# Altium PCB Inc_filter_v1.PcbDoc (part 1 of 4)
Units mil, origin at the board's own origin, x right, y up, seen from the top; angles counter-clockwise.
Board outline 13370 x 13370 mil, 2 copper layers (Top Layer, Bottom Layer); 602 components, 261 nets, 1625 pads, 355 vias.
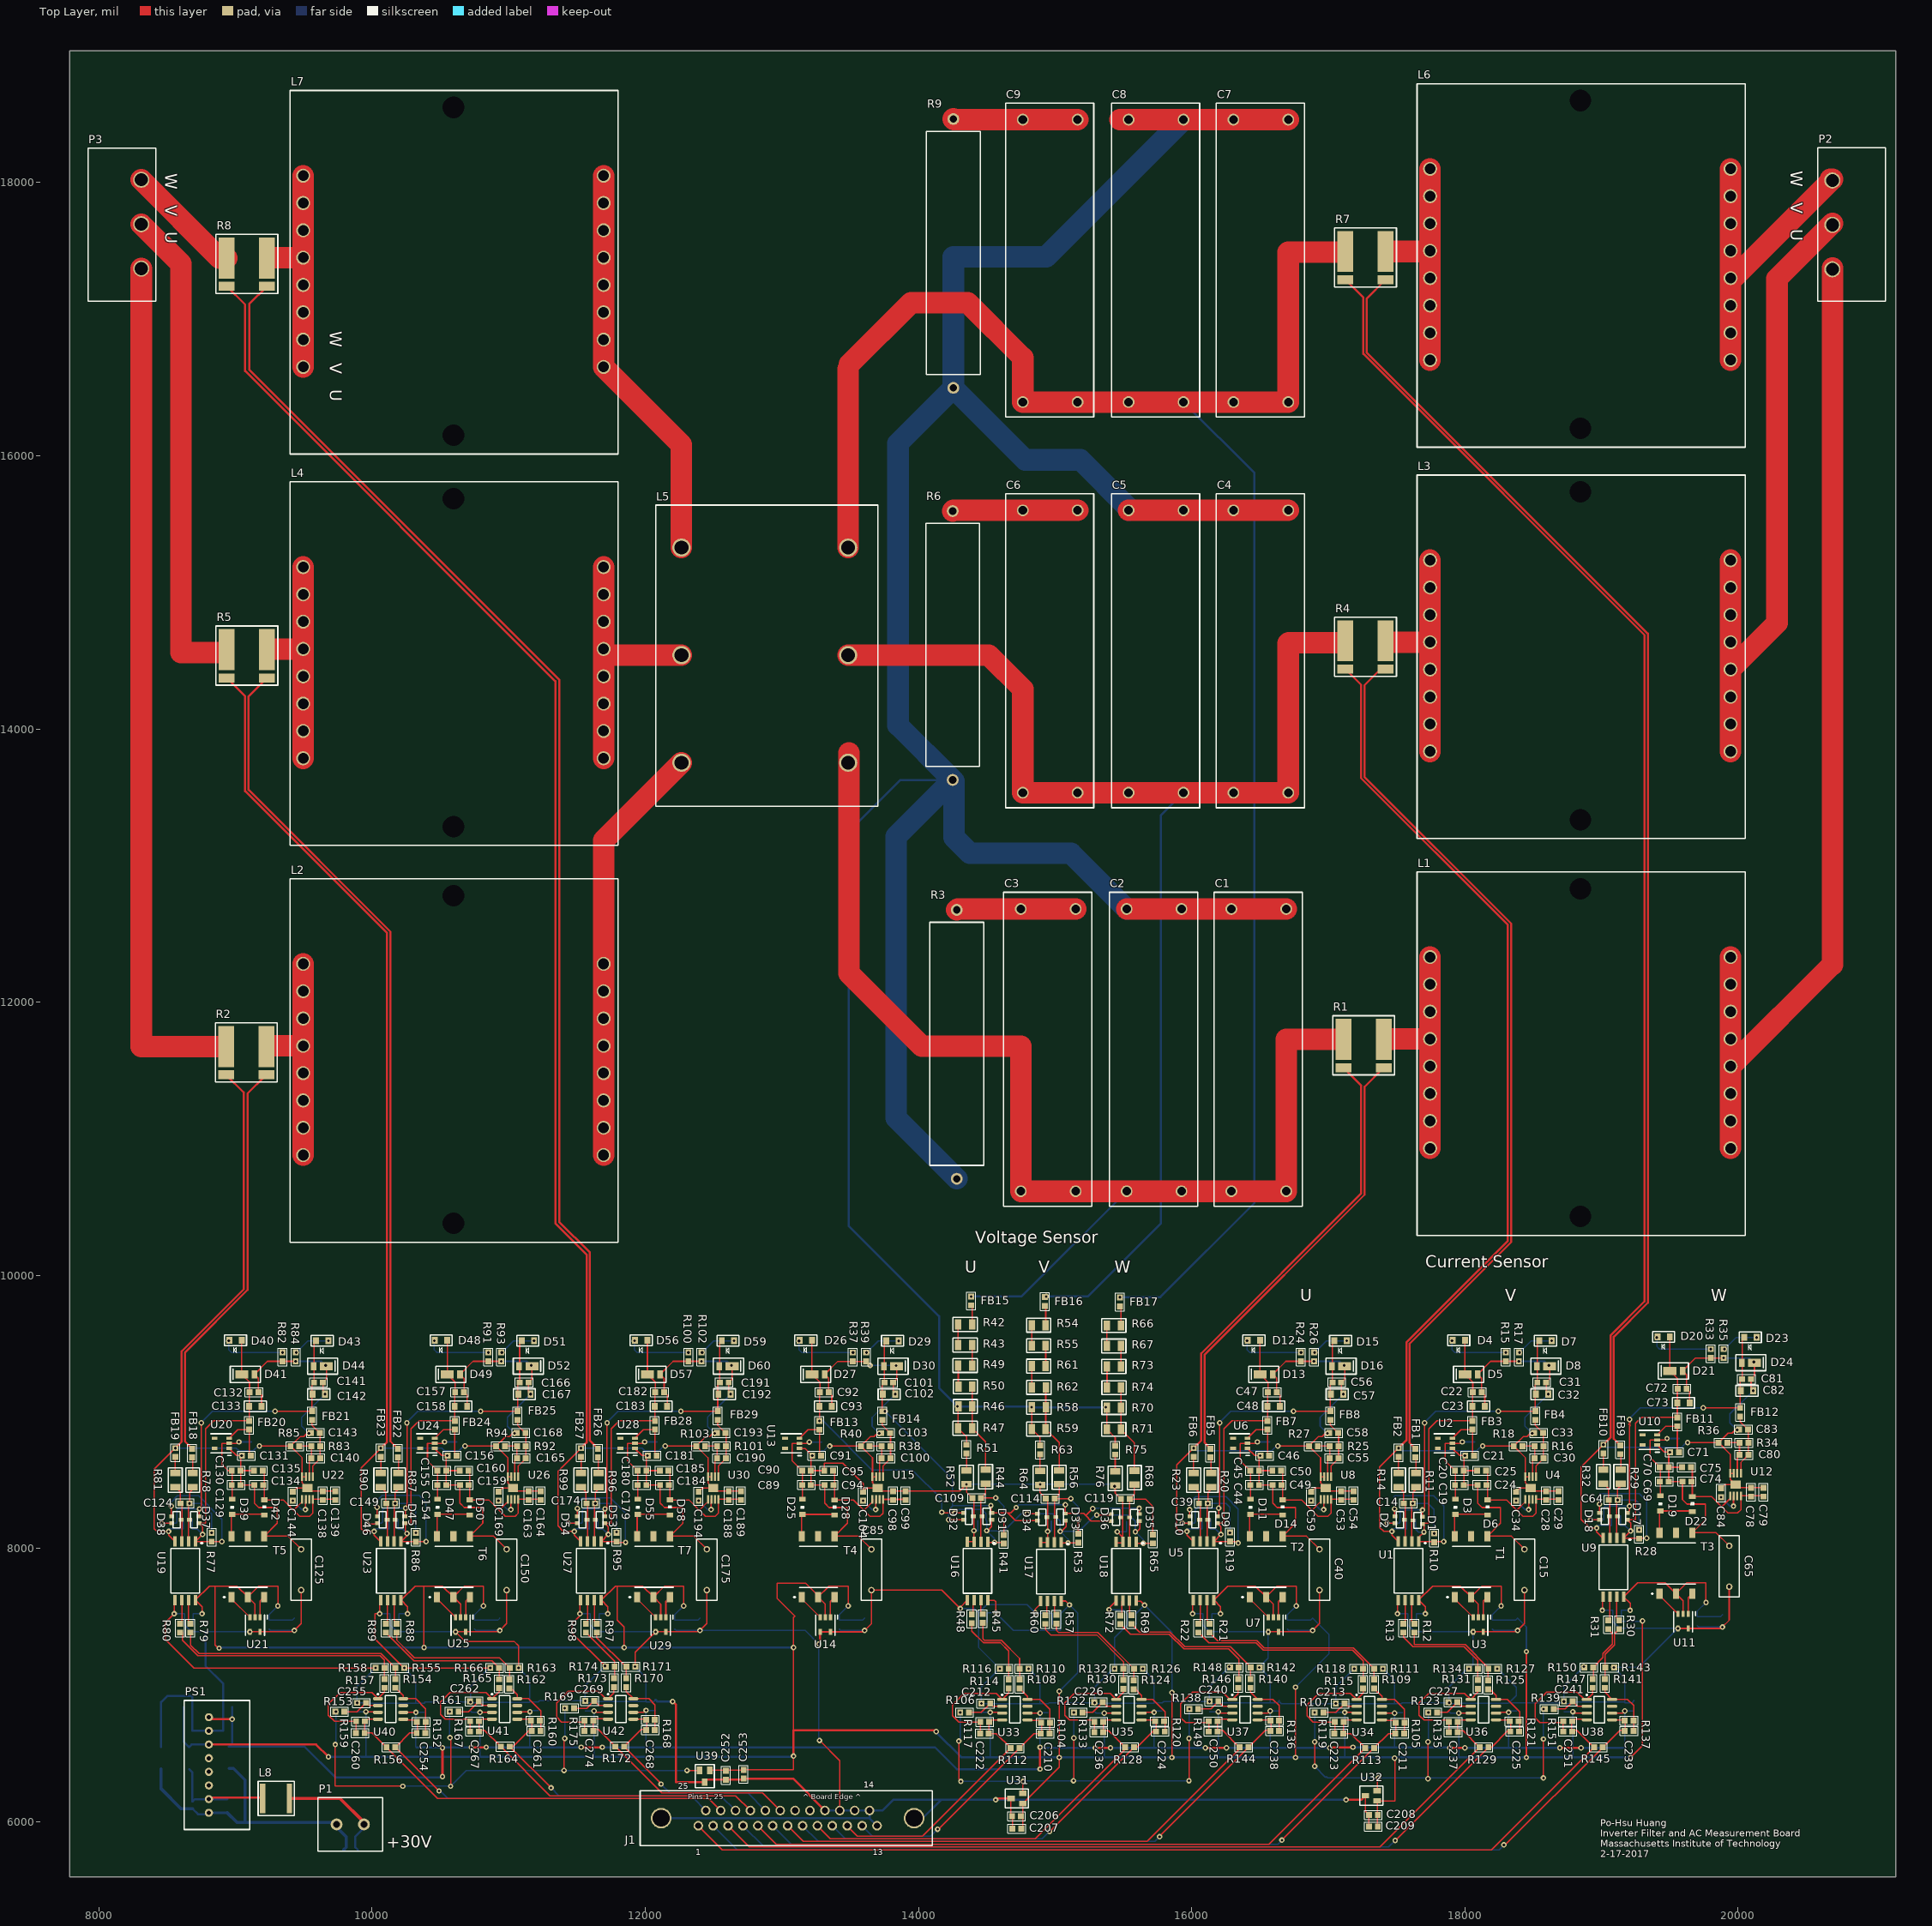
[diagram p0: Top Layer view]
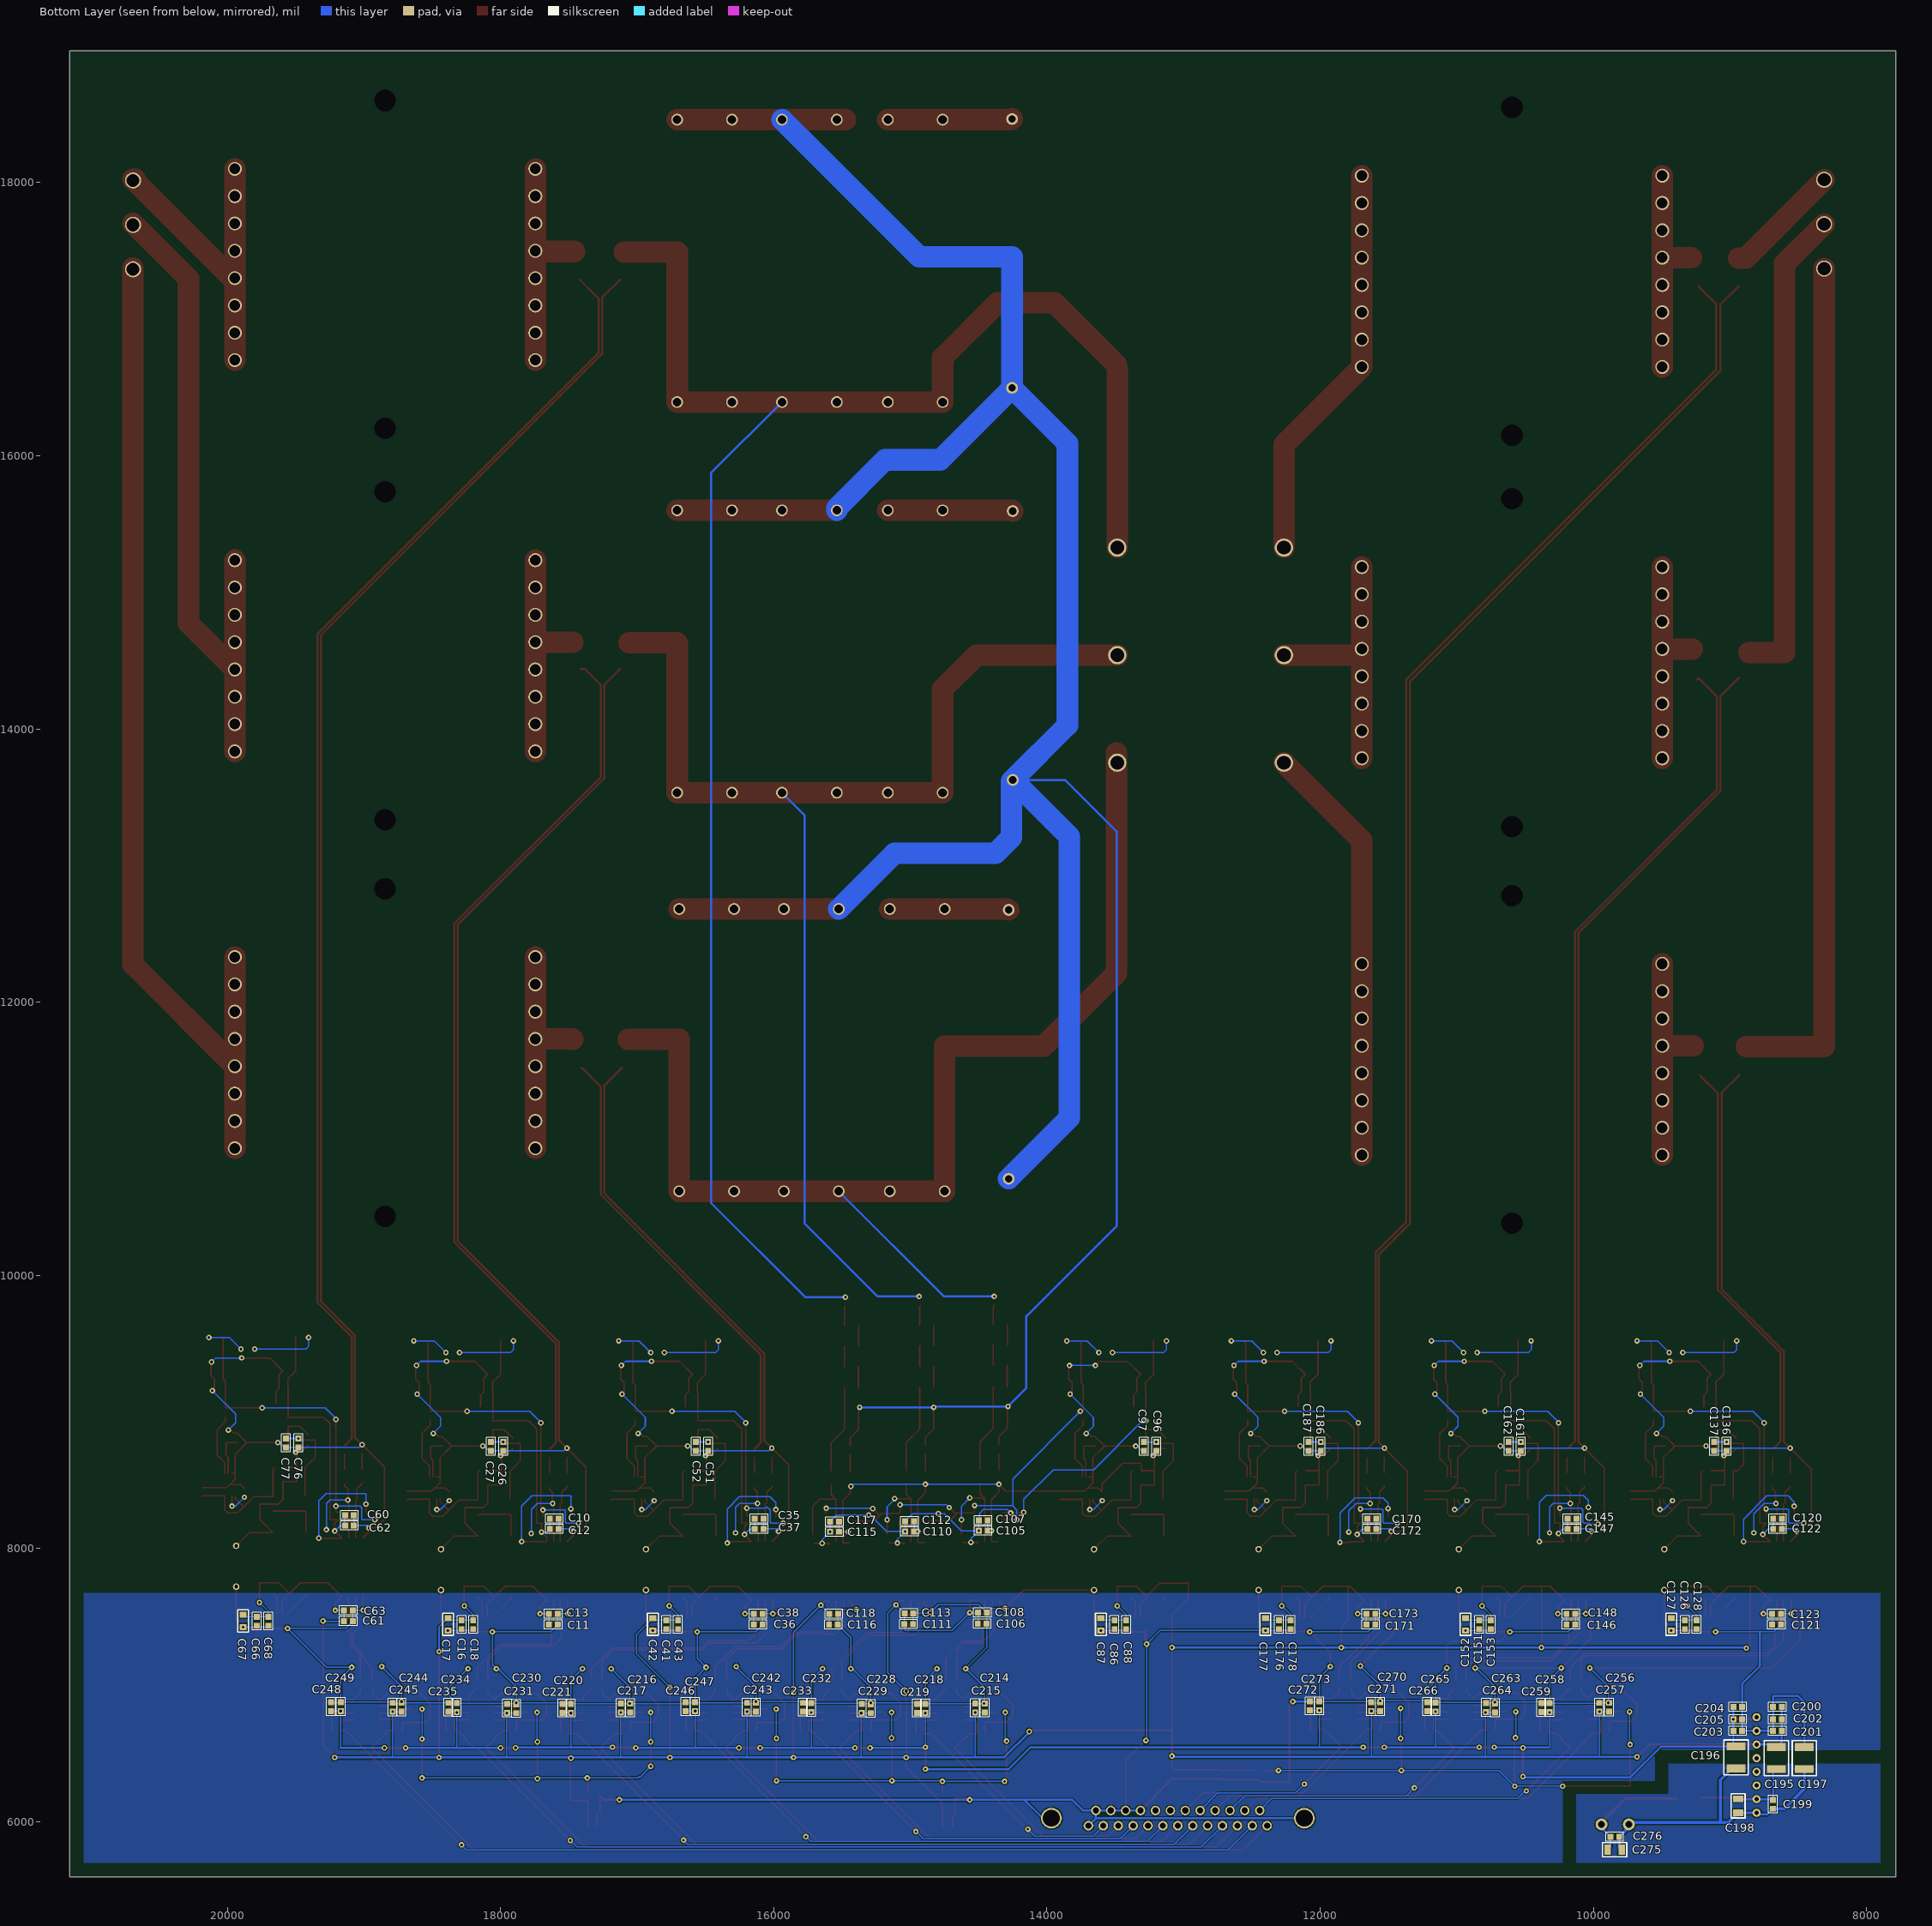
[diagram p1: Bottom Layer view, seen from below]

## Layer stack, top to bottom
Top Solder: solder mask 0.4, Solder Resist, Dk 3.5
Top Layer: signal copper 2.8
Dielectric 1: dielectric 12.6, FR-4, Dk 4.8
Bottom Layer: signal copper 2.8
Bottom Solder: solder mask 0.4, Solder Resist, Dk 3.5

## Board outline
7785,5595 21155,5595 21155,18965 7785,18965

## Design rules (kind name [scope] priority, off if disabled: settings)
Clearance [All] p1: gap=8 ignorepadtopadclearanceinfootprint=FALSE
HoleSize [All] p1: absolutevalues=TRUE maxlimit=200 minlimit=15 maxpercent=80.000 minpercent=20.000
MinimumSolderMaskSliver [All] p1: minsoldermaskwidth=6
PolygonConnect [All] p1: connectstyle=Relief reliefconductorwidth=10 reliefentries=4 polygonreliefangle="90 Angle" airgapwidth=10
RoutingVias [All] p1: holewidth=20 width=40 viastyle="Through Hole" minholewidth=20 minwidth=40 maxholewidth=25 maxwidth=50
SilkToSilkClearance [All] p1 off: silktosilkclearance=10
SilkToSolderMaskClearance [IsPad] p1 off: minsilkscreentomaskgap=10 clearancetoexposedcopper=TRUE
SolderMaskExpansion [All] p1: expansion=0
Width [All] p1: maxlimit=400 minlimit=7 preferedwidth=10
26 further rules are at their usual default settings.

## Classes and differential pairs
component class "Power Supply": C195 C196 C197 C198 C199 C200 C201 C202 C203 C204 C205 C275 C276 L8 P1 PS1
component class Out_current_sensor_UVW: C120 C121 C122 C123 C124 C125 C126 C127 C128 C129 C130 C131 C132 C133 C134 C135 C136 C137 C138 C139 C140 C141 C142 C143 C144 C145 C146 C147 C148 C149 C150 C151 C152 C153 C154 C155 C156 C157 C158 C159 C160 C161 C162 C163 C164 C165 C166 C167 C168 C169 C170 C171 C172 C173 C174 C175 C176 C177 C178 C179 C180 C181 C182 C183 C184 C185 C186 C187 C188 C189 C190 C191 C192 C193 C194 D37 D38 D39 D40 D41 D42 D43 D44 D45 D46 D47 D48 D49 D50 D51 D52 D53 D54 D55 D56 D57 D58 D59 D60 FB18 FB19 FB20 FB21 FB22 FB23 FB24 FB25 FB26 FB27 FB28 FB29 R77 R78 R79 R80 R81 R82 R83 R84 R85 R86 R87 R88 R89 R90 R91 R92 R93 R94 R95 R96 R97 R98 R99 R100 R101 R102 R103 T5 T6 T7 U19 U20 U21 U22 U23 U24 U25 U26 U27 U28 U29 U30
component class Voltage_sensor_UVW: C85 C86 C87 C88 C89 C90 C91 C92 C93 C94 C95 C96 C97 C98 C99 C100 C101 C102 C103 C104 C105 C106 C107 C108 C109 C110 C111 C112 C113 C114 C115 C116 C117 C118 C119 D25 D26 D27 D28 D29 D30 D31 D32 D33 D34 D35 D36 FB13 FB14 FB15 FB16 FB17 R37 R38 R39 R40 R41 R42 R43 R44 R45 R46 R47 R48 R49 R50 R51 R52 R53 R54 R55 R56 R57 R58 R59 R60 R61 R62 R63 R64 R65 R66 R67 R68 R69 R70 R71 R72 R73 R74 R75 R76 T4 U13 U14 U15 U16 U17 U18
component class Ind_current_sensor_VW: C10 C11 C12 C13 C14 C15 C16 C17 C18 C19 C20 C21 C22 C23 C24 C25 C26 C27 C28 C29 C30 C31 C32 C33 C34 C60 C61 C62 C63 C64 C65 C66 C67 C68 C69 C70 C71 C72 C73 C74 C75 C76 C77 C78 C79 C80 C81 C82 C83 C84 D1 D2 D3 D4 D5 D6 D7 D8 D17 D18 D19 D20 D21 D22 D23 D24 FB1 FB2 FB3 FB4 FB9 FB10 FB11 FB12 R10 R11 R12 R13 R14 R15 R16 R17 R18 R28 R29 R30 R31 R32 R33 R34 R35 R36 T1 T3 U1 U2 U3 U4 U9 U10 U11 U12
component class LCL: C1 C2 C3 C4 C5 C6 C7 C8 C9 J1 L1 L2 L3 L4 L5 L6 L7 P2 P3 R1 R2 R3 R4 R5 R6 R7 R8 R9 R?
component class Ind_current_sensor_U: C35 C36 C37 C38 C39 C40 C41 C42 C43 C44 C45 C46 C47 C48 C49 C50 C51 C52 C53 C54 C55 C56 C57 C58 C59 D9 D10 D11 D12 D13 D14 D15 D16 FB5 FB6 FB7 FB8 R19 R20 R21 R22 R23 R24 R25 R26 R27 T2 U5 U6 U7 U8
component class "Analog Transmission": C206 C207 C208 C209 C210 C211 C212 C213 C214 C215 C216 C217 C218 C219 C220 C221 C222 C223 C224 C225 C226 C227 C228 C229 C230 C231 C232 C233 C234 C235 C236 C237 C238 C239 C240 C241 C242 C243 C244 C245 C246 C247 C248 C249 C250 C251 C252 C253 C254 C255 C256 C257 C258 C259 C260 C261 C262 C263 C264 C265 C266 C267 C268 C269 C270 C271 C272 C273 C274 R104 R105 R106 R107 R108 R109 R110 R111 R112 R113 R114 R115 R116 R117 R118 R119 R120 R121 R122 R123 R124 R125 R126 R127 R128 R129 R130 R131 R132 R133 R134 R135 R136 R137 R138 R139 R140 R141 R142 R143 R144 R145 R146 R147 R148 R149 R150 R151 R152 R153 R154 R155 R156 R157 R158 R159 R160 R161 R162 R163 R164 R165 R166 R167 R168 R169 R170 R171 R172 R173 R174 R175 U31 U32 U33 U34 U35 U36 U37 U38 U39 U40 U41 U42

## Components (designator, comment, footprint, x,y, rotation, side; value= is the part's Value field where it differs from the comment)
C1 "Cap Film Radial - 4 Leads" "Radial - 4 Leads" 16691.57,12681.93 r270 top
C2 "Cap Film Radial - 4 Leads" "Radial - 4 Leads" 15925,12681.93 r270 top
C3 "Cap Film Radial - 4 Leads" "Radial - 4 Leads" 15150,12681.93 r270 top
C4 "Cap Film Radial - 4 Leads" "Radial - 4 Leads" 16706.57,15600 r270 top
C5 "Cap Film Radial - 4 Leads" "Radial - 4 Leads" 15940,15600 r270 top
C6 "Cap Film Radial - 4 Leads" "Radial - 4 Leads" 15165,15600 r270 top
C7 "Cap Film Radial - 4 Leads" "Radial - 4 Leads" 16706.57,18460 r270 top
C8 "Cap Film Radial - 4 Leads" "Radial - 4 Leads" 15940,18460 r270 top
C9 "Cap Film Radial - 4 Leads" "Radial - 4 Leads" 15165,18460 r270 top
C10 "Cap 0603_new" "0603 (1608 Metric)" 17606.48,8217.96 r0 bottom value=1uF
C11 "Cap 0603_new" "0603 (1608 Metric)" 17614,7441.96 r180 bottom value=1uF
C12 "Cap 0603_new" "0603 (1608 Metric)" 17606.48,8141.96 r0 bottom value=0.1uF
C13 "Cap 0603_new" "0603 (1608 Metric)" 17614,7521.96 r180 bottom value=0.1uF
C14 "Cap 0603_new" "0603 (1608 Metric)" 17586,8329.96 r180 top value=330pF
C15 "Cap TH" RAD-0.3 18435.28,7845 r90 top value=1000pF
C16 "Cap 0603_new" "0603 (1608 Metric)" 18285.28,7442.48 r90 bottom value=10uF
C17 "Cap 0805" "0805 (2012 metric)" 18385.28,7445 r90 bottom value=22uF
C18 "Cap 0603_new" "0603 (1608 Metric)" 18200.28,7442.48 r90 bottom value=0.1uF
C19 "Cap 0603_new" "0603 (1608 Metric)" 17960.28,8465 r180 top value=10uF
C20 "Cap 0603_new" "0603 (1608 Metric)" 17960.28,8570 r180 top value=0.1uF
C21 "Cap 0603_new" "0603 (1608 Metric)" 18035.28,8680 r0 top value=10uF
C22 "Cap 0603_new" "0603 (1608 Metric)" 18090.28,9145 r180 top value=0.1uF
C23 "Cap 0805" "0805 (2012 metric)" 18100.28,9040 r180 top value=4.7uF
C24 "Cap 0603_new" "0603 (1608 Metric)" 18125.28,8465 r180 top value=10uF
C25 "Cap 0603_new" "0603 (1608 Metric)" 18122.8,8570 r180 top value=0.1uF
C26 "Cap 0603_new" "0603 (1608 Metric)" 17980.28,8747.52 r90 bottom value=10uF
C27 "Cap 0603_new" "0603 (1608 Metric)" 18070.28,8747.52 r90 bottom value=0.1uF
C28 "Cap 0603_new" "0603 (1608 Metric)" 18595.28,8387.48 r270 top value=10uF
C29 "Cap 0603_new" "0603 (1608 Metric)" 18685.28,8387.52 r270 top value=0.1uF
C30 "Cap 0603_new" "0603 (1608 Metric)" 18542.8,8660 r180 top value=0.01uF
C31 "Cap 0603_new" "0603 (1608 Metric)" 18562.8,9215 r180 top value=0.1uF
C32 "Cap 0805" "0805 (2012 metric)" 18565,9130 r180 top value=4.7uF
C33 "Cap 0603_new" "0603 (1608 Metric)" 18540.28,8845 r0 top value=10uF
C34 "Cap 0603_new" "0603 (1608 Metric)" 18375.28,8382.48 r270 top value=0.01uF
C35 "Cap 0603_new" "0603 (1608 Metric)" 16106.48,8217.96 r0 bottom value=1uF
C36 "Cap 0603_new" "0603 (1608 Metric)" 16114,7441.96 r180 bottom value=1uF
C37 "Cap 0603_new" "0603 (1608 Metric)" 16106.48,8141.96 r0 bottom value=0.1uF
C38 "Cap 0603_new" "0603 (1608 Metric)" 16114,7521.96 r180 bottom value=0.1uF
C39 "Cap 0603_new" "0603 (1608 Metric)" 16086,8329.96 r180 top value=330pF
C40 "Cap TH" RAD-0.3 16935.28,7845 r90 top value=1000pF
C41 "Cap 0603_new" "0603 (1608 Metric)" 16785.28,7442.48 r90 bottom value=10uF
C42 "Cap 0805" "0805 (2012 metric)" 16885.28,7445 r90 bottom value=22uF
C43 "Cap 0603_new" "0603 (1608 Metric)" 16700.28,7442.48 r90 bottom value=0.1uF
C44 "Cap 0603_new" "0603 (1608 Metric)" 16460.28,8465 r180 top value=10uF
C45 "Cap 0603_new" "0603 (1608 Metric)" 16460.28,8570 r180 top value=0.1uF
C46 "Cap 0603_new" "0603 (1608 Metric)" 16535.28,8680 r0 top value=10uF
C47 "Cap 0603_new" "0603 (1608 Metric)" 16590.28,9145 r180 top value=0.1uF
C48 "Cap 0805" "0805 (2012 metric)" 16600.28,9040 r180 top value=4.7uF
C49 "Cap 0603_new" "0603 (1608 Metric)" 16625.28,8465 r180 top value=10uF
C50 "Cap 0603_new" "0603 (1608 Metric)" 16622.8,8570 r180 top value=0.1uF
C51 "Cap 0603_new" "0603 (1608 Metric)" 16480.28,8747.52 r90 bottom value=10uF
C52 "Cap 0603_new" "0603 (1608 Metric)" 16570.28,8747.52 r90 bottom value=0.1uF
C53 "Cap 0603_new" "0603 (1608 Metric)" 17095.28,8387.48 r270 top value=10uF
C54 "Cap 0603_new" "0603 (1608 Metric)" 17185.28,8387.52 r270 top value=0.1uF
C55 "Cap 0603_new" "0603 (1608 Metric)" 17042.8,8660 r180 top value=0.01uF
C56 "Cap 0603_new" "0603 (1608 Metric)" 17062.8,9215 r180 top value=0.1uF
C57 "Cap 0805" "0805 (2012 metric)" 17065,9130 r180 top value=4.7uF
C58 "Cap 0603_new" "0603 (1608 Metric)" 17040.28,8845 r0 top value=10uF
C59 "Cap 0603_new" "0603 (1608 Metric)" 16875.28,8382.48 r270 top value=0.01uF
C60 "Cap 0603_new" "0603 (1608 Metric)" 19106.2,8242.96 r0 bottom value=1uF
C61 "Cap 0603_new" "0603 (1608 Metric)" 19113.72,7466.96 r180 bottom value=1uF
C62 "Cap 0603_new" "0603 (1608 Metric)" 19106.2,8166.96 r0 bottom value=0.1uF
C63 "Cap 0603_new" "0603 (1608 Metric)" 19113.72,7546.96 r180 bottom value=0.1uF
C64 "Cap 0603_new" "0603 (1608 Metric)" 19085.72,8354.96 r180 top value=330pF
C65 "Cap TH" RAD-0.3 19935,7870 r90 top value=1000pF
C66 "Cap 0603_new" "0603 (1608 Metric)" 19785,7467.48 r90 bottom value=10uF
C67 "Cap 0805" "0805 (2012 metric)" 19885,7470 r90 bottom value=22uF
C68 "Cap 0603_new" "0603 (1608 Metric)" 19700,7467.48 r90 bottom value=0.1uF
C69 "Cap 0603_new" "0603 (1608 Metric)" 19460,8490 r180 top value=10uF
C70 "Cap 0603_new" "0603 (1608 Metric)" 19460,8595 r180 top value=0.1uF
C71 "Cap 0603_new" "0603 (1608 Metric)" 19535,8705 r0 top value=10uF
C72 "Cap 0603_new" "0603 (1608 Metric)" 19590,9170 r180 top value=0.1uF
C73 "Cap 0805" "0805 (2012 metric)" 19600,9065 r180 top value=4.7uF
C74 "Cap 0603_new" "0603 (1608 Metric)" 19625,8490 r180 top value=10uF
C75 "Cap 0603_new" "0603 (1608 Metric)" 19622.52,8595 r180 top value=0.1uF
C76 "Cap 0603_new" "0603 (1608 Metric)" 19480,8772.52 r90 bottom value=10uF
C77 "Cap 0603_new" "0603 (1608 Metric)" 19570,8772.52 r90 bottom value=0.1uF
C78 "Cap 0603_new" "0603 (1608 Metric)" 20095,8412.48 r270 top value=10uF
C79 "Cap 0603_new" "0603 (1608 Metric)" 20185,8412.52 r270 top value=0.1uF
C80 "Cap 0603_new" "0603 (1608 Metric)" 20042.52,8685 r180 top value=0.01uF
C81 "Cap 0603_new" "0603 (1608 Metric)" 20062.52,9240 r180 top value=0.1uF
C82 "Cap 0805" "0805 (2012 metric)" 20064.72,9155 r180 top value=4.7uF
C83 "Cap 0603_new" "0603 (1608 Metric)" 20040,8870 r0 top value=10uF
C84 "Cap 0603_new" "0603 (1608 Metric)" 19875,8407.48 r270 top value=0.01uF
C85 "Cap TH" RAD-0.3 13655,7844.72 r90 top value=1000pF
C86 "Cap 0603_new" "0603 (1608 Metric)" 13505,7442.2 r90 bottom value=10uF
C87 "Cap 0805" "0805 (2012 metric)" 13605,7444.72 r90 bottom value=22uF
C88 "Cap 0603_new" "0603 (1608 Metric)" 13420,7442.2 r90 bottom value=0.1uF
C89 "Cap 0603_new" "0603 (1608 Metric)" 13180,8464.72 r180 top value=10uF
C90 "Cap 0603_new" "0603 (1608 Metric)" 13180,8569.72 r180 top value=0.1uF
C91 "Cap 0603_new" "0603 (1608 Metric)" 13255,8679.72 r0 top value=10uF
C92 "Cap 0603_new" "0603 (1608 Metric)" 13310,9144.72 r180 top value=0.1uF
C93 "Cap 0805" "0805 (2012 metric)" 13320,9039.72 r180 top value=4.7uF
C94 "Cap 0603_new" "0603 (1608 Metric)" 13345,8464.72 r180 top value=10uF
C95 "Cap 0603_new" "0603 (1608 Metric)" 13342.52,8569.72 r180 top value=0.1uF
C96 "Cap 0603_new" "0603 (1608 Metric)" 13200,8747.24 r90 bottom value=10uF
C97 "Cap 0603_new" "0603 (1608 Metric)" 13290,8747.24 r90 bottom value=0.1uF
C98 "Cap 0603_new" "0603 (1608 Metric)" 13815,8387.2 r270 top value=10uF
C99 "Cap 0603_new" "0603 (1608 Metric)" 13905,8387.24 r270 top value=0.1uF
C100 "Cap 0603_new" "0603 (1608 Metric)" 13762.52,8659.72 r180 top value=0.01uF
C101 "Cap 0603_new" "0603 (1608 Metric)" 13782.52,9214.72 r180 top value=0.1uF
C102 "Cap 0805" "0805 (2012 metric)" 13784.72,9129.72 r180 top value=4.7uF
C103 "Cap 0603_new" "0603 (1608 Metric)" 13760,8844.72 r0 top value=10uF
C104 "Cap 0603_new" "0603 (1608 Metric)" 13595,8382.2 r270 top value=0.01uF
C105 "Cap 0603_new" "0603 (1608 Metric)" 14466.18,8130 r0 bottom value=1uF
C106 "Cap 0603_new" "0603 (1608 Metric)" 14473.7,7450 r180 bottom value=1uF
C107 "Cap 0603_new" "0603 (1608 Metric)" 14466.18,8205 r0 bottom value=0.1uF
C108 "Cap 0603_new" "0603 (1608 Metric)" 14471.18,7530 r180 bottom value=0.1uF
C109 "Cap 0603_new" "0603 (1608 Metric)" 14426.18,8370 r180 top value=330pF
C110 "Cap 0603_new" "0603 (1608 Metric)" 15004.96,8124.96 r0 bottom value=1uF
C111 "Cap 0603_new" "0603 (1608 Metric)" 15012.48,7444.96 r180 bottom value=1uF
C112 "Cap 0603_new" "0603 (1608 Metric)" 15004.96,8199.96 r0 bottom value=0.1uF
C113 "Cap 0603_new" "0603 (1608 Metric)" 15009.96,7524.96 r180 bottom value=0.1uF
C114 "Cap 0603_new" "0603 (1608 Metric)" 14964.96,8364.96 r180 top value=330pF
C115 "Cap 0603_new" "0603 (1608 Metric)" 15555,8122.48 r0 bottom value=1uF
C116 "Cap 0603_new" "0603 (1608 Metric)" 15562.52,7442.48 r180 bottom value=1uF
C117 "Cap 0603_new" "0603 (1608 Metric)" 15555,8197.48 r0 bottom value=0.1uF
C118 "Cap 0603_new" "0603 (1608 Metric)" 15560,7522.48 r180 bottom value=0.1uF
C119 "Cap 0603_new" "0603 (1608 Metric)" 15515,8362.48 r180 top value=330pF
C120 "Cap 0603_new" "0603 (1608 Metric)" 8651.2,8217.96 r0 bottom value=1uF
C121 "Cap 0603_new" "0603 (1608 Metric)" 8658.72,7441.96 r180 bottom value=1uF
C122 "Cap 0603_new" "0603 (1608 Metric)" 8651.2,8141.96 r0 bottom value=0.1uF
C123 "Cap 0603_new" "0603 (1608 Metric)" 8658.72,7521.96 r180 bottom value=0.1uF
C124 "Cap 0603_new" "0603 (1608 Metric)" 8630.72,8329.96 r180 top value=330pF
C125 "Cap TH" RAD-0.3 9480,7845 r90 top value=1000pF
C126 "Cap 0603_new" "0603 (1608 Metric)" 9330,7442.48 r90 bottom value=10uF
C127 "Cap 0805" "0805 (2012 metric)" 9430,7445 r90 bottom value=22uF
C128 "Cap 0603_new" "0603 (1608 Metric)" 9245,7442.48 r90 bottom value=0.1uF
C129 "Cap 0603_new" "0603 (1608 Metric)" 9005,8465 r180 top value=10uF
C130 "Cap 0603_new" "0603 (1608 Metric)" 9005,8570 r180 top value=0.1uF
C131 "Cap 0603_new" "0603 (1608 Metric)" 9080,8680 r0 top value=10uF
C132 "Cap 0603_new" "0603 (1608 Metric)" 9135,9145 r180 top value=0.1uF
C133 "Cap 0805" "0805 (2012 metric)" 9145,9040 r180 top value=4.7uF
C134 "Cap 0603_new" "0603 (1608 Metric)" 9170,8465 r180 top value=10uF
C135 "Cap 0603_new" "0603 (1608 Metric)" 9167.52,8570 r180 top value=0.1uF
C136 "Cap 0603_new" "0603 (1608 Metric)" 9025,8747.52 r90 bottom value=10uF
C137 "Cap 0603_new" "0603 (1608 Metric)" 9115,8747.52 r90 bottom value=0.1uF
C138 "Cap 0603_new" "0603 (1608 Metric)" 9640,8387.48 r270 top value=10uF
C139 "Cap 0603_new" "0603 (1608 Metric)" 9730,8387.52 r270 top value=0.1uF
C140 "Cap 0603_new" "0603 (1608 Metric)" 9587.52,8660 r180 top value=0.01uF
C141 "Cap 0603_new" "0603 (1608 Metric)" 9607.52,9215 r180 top value=0.1uF
C142 "Cap 0805" "0805 (2012 metric)" 9609.72,9130 r180 top value=4.7uF
C143 "Cap 0603_new" "0603 (1608 Metric)" 9585,8845 r0 top value=10uF
C144 "Cap 0603_new" "0603 (1608 Metric)" 9420,8382.48 r270 top value=0.01uF
C145 "Cap 0603_new" "0603 (1608 Metric)" 10156.2,8217.96 r0 bottom value=1uF
C146 "Cap 0603_new" "0603 (1608 Metric)" 10163.72,7441.96 r180 bottom value=1uF
C147 "Cap 0603_new" "0603 (1608 Metric)" 10156.2,8141.96 r0 bottom value=0.1uF
C148 "Cap 0603_new" "0603 (1608 Metric)" 10163.72,7521.96 r180 bottom value=0.1uF
C149 "Cap 0603_new" "0603 (1608 Metric)" 10135.72,8329.96 r180 top value=330pF
C150 "Cap TH" RAD-0.3 10985,7845 r90 top value=1000pF
C151 "Cap 0603_new" "0603 (1608 Metric)" 10835,7442.48 r90 bottom value=10uF
C152 "Cap 0805" "0805 (2012 metric)" 10935,7445 r90 bottom value=22uF
C153 "Cap 0603_new" "0603 (1608 Metric)" 10750,7442.48 r90 bottom value=0.1uF
C154 "Cap 0603_new" "0603 (1608 Metric)" 10510,8465 r180 top value=10uF
C155 "Cap 0603_new" "0603 (1608 Metric)" 10510,8570 r180 top value=0.1uF
C156 "Cap 0603_new" "0603 (1608 Metric)" 10585,8680 r0 top value=10uF
C157 "Cap 0603_new" "0603 (1608 Metric)" 10640,9145 r180 top value=0.1uF
C158 "Cap 0805" "0805 (2012 metric)" 10650,9040 r180 top value=4.7uF
C159 "Cap 0603_new" "0603 (1608 Metric)" 10675,8465 r180 top value=10uF
C160 "Cap 0603_new" "0603 (1608 Metric)" 10672.52,8570 r180 top value=0.1uF
C161 "Cap 0603_new" "0603 (1608 Metric)" 10530,8747.52 r90 bottom value=10uF
C162 "Cap 0603_new" "0603 (1608 Metric)" 10620,8747.52 r90 bottom value=0.1uF
C163 "Cap 0603_new" "0603 (1608 Metric)" 11145,8387.48 r270 top value=10uF
C164 "Cap 0603_new" "0603 (1608 Metric)" 11235,8387.52 r270 top value=0.1uF
C165 "Cap 0603_new" "0603 (1608 Metric)" 11092.52,8660 r180 top value=0.01uF
C166 "Cap 0603_new" "0603 (1608 Metric)" 11112.52,9215 r180 top value=0.1uF
C167 "Cap 0805" "0805 (2012 metric)" 11114.72,9130 r180 top value=4.7uF
C168 "Cap 0603_new" "0603 (1608 Metric)" 11090,8845 r0 top value=10uF
C169 "Cap 0603_new" "0603 (1608 Metric)" 10925,8382.48 r270 top value=0.01uF
C170 "Cap 0603_new" "0603 (1608 Metric)" 11621.48,8217.96 r0 bottom value=1uF
C171 "Cap 0603_new" "0603 (1608 Metric)" 11629,7441.96 r180 bottom value=1uF
C172 "Cap 0603_new" "0603 (1608 Metric)" 11621.48,8141.96 r0 bottom value=0.1uF
C173 "Cap 0603_new" "0603 (1608 Metric)" 11629,7521.96 r180 bottom value=0.1uF
C174 "Cap 0603_new" "0603 (1608 Metric)" 11601,8329.96 r180 top value=330pF
C175 "Cap TH" RAD-0.3 12450.28,7845 r90 top value=1000pF
C176 "Cap 0603_new" "0603 (1608 Metric)" 12300.28,7442.48 r90 bottom value=10uF
C177 "Cap 0805" "0805 (2012 metric)" 12400.28,7445 r90 bottom value=22uF
C178 "Cap 0603_new" "0603 (1608 Metric)" 12215.28,7442.48 r90 bottom value=0.1uF
C179 "Cap 0603_new" "0603 (1608 Metric)" 11975.28,8465 r180 top value=10uF
C180 "Cap 0603_new" "0603 (1608 Metric)" 11975.28,8570 r180 top value=0.1uF
C181 "Cap 0603_new" "0603 (1608 Metric)" 12050.28,8680 r0 top value=10uF
C182 "Cap 0603_new" "0603 (1608 Metric)" 12105.28,9145 r180 top value=0.1uF
C183 "Cap 0805" "0805 (2012 metric)" 12115.28,9040 r180 top value=4.7uF
C184 "Cap 0603_new" "0603 (1608 Metric)" 12140.28,8465 r180 top value=10uF
C185 "Cap 0603_new" "0603 (1608 Metric)" 12137.8,8570 r180 top value=0.1uF
C186 "Cap 0603_new" "0603 (1608 Metric)" 11995.28,8747.52 r90 bottom value=10uF
C187 "Cap 0603_new" "0603 (1608 Metric)" 12085.28,8747.52 r90 bottom value=0.1uF
C188 "Cap 0603_new" "0603 (1608 Metric)" 12610.28,8387.48 r270 top value=10uF
C189 "Cap 0603_new" "0603 (1608 Metric)" 12700.28,8387.52 r270 top value=0.1uF
C190 "Cap 0603_new" "0603 (1608 Metric)" 12557.8,8660 r180 top value=0.01uF
C191 "Cap 0603_new" "0603 (1608 Metric)" 12577.8,9215 r180 top value=0.1uF
C192 "Cap 0805" "0805 (2012 metric)" 12580,9130 r180 top value=4.7uF
C193 "Cap 0603_new" "0603 (1608 Metric)" 12555.28,8845 r0 top value=10uF
C194 "Cap 0603_new" "0603 (1608 Metric)" 12390.28,8382.48 r270 top value=0.01uF
C195 "Cap 1812" "1812 (4532 Metric)" 8660,6465.71 r180 bottom
C196 "Cap 1812" "1812 (4532 Metric)" 8955,6470.71 r180 bottom
C197 "Cap 1812" "1812 (4532 Metric)" 8455,6465.71 r180 bottom
C198 "Cap 1206" 1206 8940,6116.18 r90 bottom value="10uF 50V"
C199 "Cap 0603_new" "0603 (1608 Metric)" 8685,6127.52 r90 bottom value=0.1uF
C200 "Cap 0603_new" "0603 (1608 Metric)" 8652.48,6840 r180 bottom value=0.1uF
C201 "Cap 0603_new" "0603 (1608 Metric)" 8652.48,6665 r180 bottom value=10nF
C202 "Cap 0603_new" "0603 (1608 Metric)" 8652.48,6750 r180 bottom value=10uF
C203 "Cap 0603_new" "0603 (1608 Metric)" 8942.48,6665 r180 bottom value=0.1uF
C204 "Cap 0603_new" "0603 (1608 Metric)" 8942.48,6840 r180 bottom value=10nF
C205 "Cap 0603_new" "0603 (1608 Metric)" 8942.48,6750 r180 bottom value=10uF
C206 "Cap 0603_new" "0603 (1608 Metric)" 14717.52,6040 r0 top value=10uF
C207 "Cap 0603_new" "0603 (1608 Metric)" 14720,5950 r0 top value=0.1uF
C208 "Cap 0603_new" "0603 (1608 Metric)" 17330,6050 r0 top value=10uF
C209 "Cap 0603_new" "0603 (1608 Metric)" 17330,5965 r0 top value=0.1uF
C210 "Cap 0603_new" "0603 (1608 Metric)" 14927.48,6645 r0 top value=NC
C211 "Cap 0603_new" "0603 (1608 Metric)" 17522.48,6645 r0 top value=NC
C212 "Cap 0603_new" "0603 (1608 Metric)" 14492.52,6865 r0 top value=0.1uF
C213 "Cap 0603_new" "0603 (1608 Metric)" 17087.52,6865 r0 top value=0.1uF
C214 "Cap 0603_new" "0603 (1608 Metric)" 14455,6832.48 r270 bottom value=0.1uF
C215 "Cap 0603_new" "0603 (1608 Metric)" 14525,6832.48 r270 bottom value=10uF
C216 "Cap 0603_new" "0603 (1608 Metric)" 17050,6832.48 r270 bottom value=0.1uF
C217 "Cap 0603_new" "0603 (1608 Metric)" 17120,6832.48 r270 bottom value=10uF
C218 "Cap 0603_new" "0603 (1608 Metric)" 14890,6830 r90 bottom value=0.1uF
C219 "Cap 0603_new" "0603 (1608 Metric)" 14950,6830 r90 bottom value=10uF
C220 "Cap 0603_new" "0603 (1608 Metric)" 17485,6830 r90 bottom value=0.1uF
C221 "Cap 0603_new" "0603 (1608 Metric)" 17545,6830 r90 bottom value=10uF
C222 "Cap 0603_new" "0603 (1608 Metric)" 14482.52,6645 r180 top value=NC
C223 "Cap 0603_new" "0603 (1608 Metric)" 17077.52,6645 r180 top value=NC
C224 "Cap 0603_new" "0603 (1608 Metric)" 15770,6660 r0 top value=NC
C225 "Cap 0603_new" "0603 (1608 Metric)" 18365,6660 r0 top value=NC
C226 "Cap 0603_new" "0603 (1608 Metric)" 15317.52,6875 r0 top value=0.1uF
C227 "Cap 0603_new" "0603 (1608 Metric)" 17912.52,6875 r0 top value=0.1uF
C228 "Cap 0603_new" "0603 (1608 Metric)" 15290,6827.48 r270 bottom value=0.1uF
C229 "Cap 0603_new" "0603 (1608 Metric)" 15355,6830 r270 bottom value=10uF
C230 "Cap 0603_new" "0603 (1608 Metric)" 17885,6827.48 r270 bottom value=0.1uF
C231 "Cap 0603_new" "0603 (1608 Metric)" 17950,6830 r270 bottom value=10uF
C232 "Cap 0603_new" "0603 (1608 Metric)" 15725,6835 r90 bottom value=0.1uF
C233 "Cap 0603_new" "0603 (1608 Metric)" 15785,6837.48 r90 bottom value=10uF
C234 "Cap 0603_new" "0603 (1608 Metric)" 18320,6835 r90 bottom value=0.1uF
C235 "Cap 0603_new" "0603 (1608 Metric)" 18380,6837.48 r90 bottom value=10uF
C236 "Cap 0603_new" "0603 (1608 Metric)" 15320,6655 r180 top value=NC
C237 "Cap 0603_new" "0603 (1608 Metric)" 17915,6655 r180 top value=NC
C238 "Cap 0603_new" "0603 (1608 Metric)" 16607.48,6665 r0 top value=NC
C239 "Cap 0603_new" "0603 (1608 Metric)" 19202.48,6665 r0 top value=NC
C240 "Cap 0603_new" "0603 (1608 Metric)" 16162.52,6880 r0 top value=0.1uF
C241 "Cap 0603_new" "0603 (1608 Metric)" 18757.52,6880 r0 top value=0.1uF
C242 "Cap 0603_new" "0603 (1608 Metric)" 16130,6837.48 r270 bottom value=0.1uF
C243 "Cap 0603_new" "0603 (1608 Metric)" 16195,6837.48 r270 bottom value=10uF
C244 "Cap 0603_new" "0603 (1608 Metric)" 18725,6837.48 r270 bottom value=0.1uF
C245 "Cap 0603_new" "0603 (1608 Metric)" 18790,6837.48 r270 bottom value=10uF
C246 "Cap 0603_new" "0603 (1608 Metric)" 16645,6842.48 r90 bottom value=0.1uF
C247 "Cap 0603_new" "0603 (1608 Metric)" 16575,6842.48 r90 bottom value=10uF
C248 "Cap 0603_new" "0603 (1608 Metric)" 19240,6842.48 r90 bottom value=0.1uF
C249 "Cap 0603_new" "0603 (1608 Metric)" 19170,6842.48 r90 bottom value=10uF
C250 "Cap 0603_new" "0603 (1608 Metric)" 16157.52,6660 r180 top value=NC
C251 "Cap 0603_new" "0603 (1608 Metric)" 18752.52,6660 r180 top value=NC
C252 "Cap 0603_new" "0603 (1608 Metric)" 12590,6340 r90 top value=10uF
C253 "Cap 0603_new" "0603 (1608 Metric)" 12720,6347.52 r90 top value=0.1uF
C254 "Cap 0603_new" "0603 (1608 Metric)" 10357.52,6650 r0 top value=NC
C255 "Cap 0603_new" "0603 (1608 Metric)" 9922.56,6870 r0 top value=0.1uF
C256 "Cap 0603_new" "0603 (1608 Metric)" 9885.04,6837.48 r270 bottom value=0.1uF
C257 "Cap 0603_new" "0603 (1608 Metric)" 9955.04,6837.48 r270 bottom value=10uF
C258 "Cap 0603_new" "0603 (1608 Metric)" 10320.04,6835 r90 bottom value=0.1uF
C259 "Cap 0603_new" "0603 (1608 Metric)" 10380.04,6835 r90 bottom value=10uF
C260 "Cap 0603_new" "0603 (1608 Metric)" 9912.56,6650 r180 top value=NC
C261 "Cap 0603_new" "0603 (1608 Metric)" 11200.04,6665 r0 top value=NC
C262 "Cap 0603_new" "0603 (1608 Metric)" 10747.56,6880 r0 top value=0.1uF
C263 "Cap 0603_new" "0603 (1608 Metric)" 10720.04,6832.48 r270 bottom value=0.1uF
C264 "Cap 0603_new" "0603 (1608 Metric)" 10785.04,6835 r270 bottom value=10uF
C265 "Cap 0603_new" "0603 (1608 Metric)" 11155.04,6840 r90 bottom value=0.1uF
C266 "Cap 0603_new" "0603 (1608 Metric)" 11215.04,6842.48 r90 bottom value=10uF
C267 "Cap 0603_new" "0603 (1608 Metric)" 10750.04,6660 r180 top value=NC
C268 "Cap 0603_new" "0603 (1608 Metric)" 12037.52,6670 r0 top value=NC
C269 "Cap 0603_new" "0603 (1608 Metric)" 11592.56,6885 r0 top value=0.1uF
C270 "Cap 0603_new" "0603 (1608 Metric)" 11560.04,6842.48 r270 bottom value=0.1uF
C271 "Cap 0603_new" "0603 (1608 Metric)" 11625.04,6842.48 r270 bottom value=10uF
C272 "Cap 0603_new" "0603 (1608 Metric)" 12075.04,6847.48 r90 bottom value=0.1uF
C273 "Cap 0603_new" "0603 (1608 Metric)" 12005.04,6847.48 r90 bottom value=10uF
C274 "Cap 0603_new" "0603 (1608 Metric)" 11587.56,6665 r180 top value=NC
C275 "Cap 1206" 1206 9843.82,5795 r180 bottom value="10uF 50V"
C276 "Cap 0603_new" "0603 (1608 Metric)" 9842.52,5890 r180 bottom value=0.1uF
D1 "TVS - Diodes" SOT323_ESD 17615.2,8205.59 r90 top value=ESD
D2 "TVS - Diodes" SOT323_ESD 17561.94,8209.96 r270 top value=ESD
D3 "Diode MBR0520" SOD-123 17930.28,8250 r90 top
D4 "LED" "0805 (2012 Metric) Diode" 17955.28,9525 r180 top
D5 "Diode Zener POWERDI123" POWERDI 18093.78,9275 r180 top
D6 "Diode MBR0520" SOD-123 18165.28,8355.83 r270 top
D7 "LED" "0805 (2012 Metric) Diode" 18590,9520 r180 top
D8 "Diode Zener POWERDI123" POWERDI 18526.77,9335 r0 top
D9 "TVS - Diodes" SOT323_ESD 16114.06,8209.96 r90 top value=ESD
D10 "TVS - Diodes" SOT323_ESD 16061.94,8209.96 r270 top value=ESD
D11 "Diode MBR0520" SOD-123 16430.28,8250 r90 top
D12 "LED" "0805 (2012 Metric) Diode" 16455.28,9525 r180 top
D13 "Diode Zener POWERDI123" POWERDI 16593.78,9275 r180 top
D14 "Diode MBR0520" SOD-123 16665.28,8355.83 r270 top
D15 "LED" "0805 (2012 Metric) Diode" 17090,9520 r180 top
D16 "Diode Zener POWERDI123" POWERDI 17026.77,9335 r0 top
D17 "TVS - Diodes" SOT323_ESD 19113.79,8234.96 r90 top value=ESD
D18 "TVS - Diodes" SOT323_ESD 19061.66,8234.96 r270 top value=ESD
D19 "Diode MBR0520" SOD-123 19430,8275 r90 top
D20 "LED" "0805 (2012 Metric) Diode" 19455,9550 r180 top
D21 "Diode Zener POWERDI123" POWERDI 19593.5,9300 r180 top
D22 "Diode MBR0520" SOD-123 19665,8380.83 r270 top
D23 "LED" "0805 (2012 Metric) Diode" 20089.72,9545 r180 top
D24 "Diode Zener POWERDI123" POWERDI 20026.5,9360 r0 top
D25 "Diode MBR0520" SOD-123 13150,8249.72 r90 top
D26 "LED" "0805 (2012 Metric) Diode" 13175,9524.72 r180 top
D27 "Diode Zener POWERDI123" POWERDI 13313.5,9274.72 r180 top
D28 "Diode MBR0520" SOD-123 13385,8355.55 r270 top
D29 "LED" "0805 (2012 Metric) Diode" 13809.72,9519.72 r180 top
D30 "Diode Zener POWERDI123" POWERDI 13746.5,9334.72 r0 top
D31 "TVS - Diodes" SOT323_ESD 14461.06,8235 r90 top value=ESD
D32 "TVS - Diodes" SOT323_ESD 14404.8,8235.59 r270 top value=ESD
D33 "TVS - Diodes" SOT323_ESD 15000.2,8230.59 r90 top value=ESD
D34 "TVS - Diodes" SOT323_ESD 14943.94,8230 r270 top value=ESD
D35 "TVS - Diodes" SOT323_ESD 15541.06,8227.48 r90 top value=ESD
D36 "TVS - Diodes" SOT323_ESD 15483.94,8227.48 r270 top value=ESD
D37 "TVS - Diodes" SOT323_ESD 8658.79,8209.96 r90 top value=ESD
D38 "TVS - Diodes" SOT323_ESD 8606.66,8209.96 r270 top value=ESD
D39 "Diode MBR0520" SOD-123 8975,8250 r90 top
D40 "LED" "0805 (2012 Metric) Diode" 9000,9525 r180 top
D41 "Diode Zener POWERDI123" POWERDI 9138.5,9275 r180 top
D42 "Diode MBR0520" SOD-123 9210,8355.83 r270 top
D43 "LED" "0805 (2012 Metric) Diode" 9634.72,9520 r180 top
D44 "Diode Zener POWERDI123" POWERDI 9571.5,9335 r0 top
D45 "TVS - Diodes" SOT323_ESD 10163.79,8209.96 r90 top value=ESD
D46 "TVS - Diodes" SOT323_ESD 10113.94,8210 r270 top value=ESD
D47 "Diode MBR0520" SOD-123 10480,8250 r90 top
D48 "LED" "0805 (2012 Metric) Diode" 10505,9525 r180 top
D49 "Diode Zener POWERDI123" POWERDI 10643.5,9275 r180 top
D50 "Diode MBR0520" SOD-123 10715,8355.83 r270 top
D51 "LED" "0805 (2012 Metric) Diode" 11139.72,9520 r180 top
D52 "Diode Zener POWERDI123" POWERDI 11076.5,9335 r0 top
D53 "TVS - Diodes" SOT323_ESD 11629.06,8209.96 r90 top value=ESD
D54 "TVS - Diodes" SOT323_ESD 11576.94,8209.96 r270 top value=ESD
D55 "Diode MBR0520" SOD-123 11945.28,8250 r90 top
D56 "LED" "0805 (2012 Metric) Diode" 11970.28,9525 r180 top
D57 "Diode Zener POWERDI123" POWERDI 12108.78,9275 r180 top
D58 "Diode MBR0520" SOD-123 12180.28,8355.83 r270 top
D59 "LED" "0805 (2012 Metric) Diode" 12605,9520 r180 top
D60 "Diode Zener POWERDI123" POWERDI 12541.77,9335 r0 top
FB1 "Ferrite bead" "0603 (1608 Metric)" 17638,8698.44 r270 top value=1K
FB2 "Ferrite bead" "0603 (1608 Metric)" 17514,8702.44 r270 top value=1K
FB3 "Ferrite bead" "0603 (1608 Metric)" 18055.28,8902.48 r90 top value=1K
FB4 "Ferrite bead" "0603 (1608 Metric)" 18515.28,8972.48 r90 top value=1K
FB5 "Ferrite bead" "0603 (1608 Metric)" 16138,8698.44 r270 top value=1K
FB6 "Ferrite bead" "0603 (1608 Metric)" 16014,8702.44 r270 top value=1K
FB7 "Ferrite bead" "0603 (1608 Metric)" 16555.28,8902.48 r90 top value=1K
FB8 "Ferrite bead" "0603 (1608 Metric)" 17015.28,8972.48 r90 top value=1K
FB9 "Ferrite bead" "0603 (1608 Metric)" 19137.72,8723.44 r270 top value=1K
FB10 "Ferrite bead" "0603 (1608 Metric)" 19013.72,8727.44 r270 top value=1K
FB11 "Ferrite bead" "0603 (1608 Metric)" 19555,8927.48 r90 top value=1K
FB12 "Ferrite bead" "0603 (1608 Metric)" 20015,8997.48 r90 top value=1K
FB13 "Ferrite bead" "0603 (1608 Metric)" 13275,8902.2 r90 top value=1K
FB14 "Ferrite bead" "0603 (1608 Metric)" 13735,8972.2 r90 top value=1K
FB15 "Ferrite bead" "0603 (1608 Metric)" 14386.18,9812.52 r270 top value=1K
FB16 "Ferrite bead" "0603 (1608 Metric)" 14924.96,9807.48 r270 top value=1K
FB17 "Ferrite bead" "0603 (1608 Metric)" 15475,9805 r270 top value=1K
FB18 "Ferrite bead" "0603 (1608 Metric)" 8682.72,8698.44 r270 top value=1K
FB19 "Ferrite bead" "0603 (1608 Metric)" 8558.72,8702.44 r270 top value=1K
FB20 "Ferrite bead" "0603 (1608 Metric)" 9100,8902.48 r90 top value=1K
FB21 "Ferrite bead" "0603 (1608 Metric)" 9560,8972.48 r90 top value=1K
FB22 "Ferrite bead" "0603 (1608 Metric)" 10187.72,8698.44 r270 top value=1K
FB23 "Ferrite bead" "0603 (1608 Metric)" 10063.72,8702.44 r270 top value=1K
FB24 "Ferrite bead" "0603 (1608 Metric)" 10605,8902.48 r90 top value=1K
FB25 "Ferrite bead" "0603 (1608 Metric)" 11065,8972.48 r90 top value=1K
FB26 "Ferrite bead" "0603 (1608 Metric)" 11653,8698.44 r270 top value=1K
FB27 "Ferrite bead" "0603 (1608 Metric)" 11529,8702.44 r270 top value=1K
FB28 "Ferrite bead" "0603 (1608 Metric)" 12070.28,8902.48 r90 top value=1K
FB29 "Ferrite bead" "0603 (1608 Metric)" 12530.28,8972.48 r90 top value=1K
J1 "DB25 conn" "Connector D-Sub Receptacle 25 pos" 13041.89,6025.91 r0 top
L1 "Inductor N27 315nH PM6249" IND_PM6249 19945,10930 r90 top
L2 "Inductor N27 315nH PM6249" IND_PM6249 11695,10880 r90 top
L3 "Inductor N27 315nH PM6249" IND_PM6249 19945,13835 r90 top
L4 "Inductor N27 315nH PM6249" IND_PM6249 11695,13785 r90 top
L5 "CM choke" "CM Choke" 13485,13752.6 r90 top
L6 "Inductor N27 315nH PM6249" IND_PM6249 19945,16700 r90 top
L7 "Inductor N27 315nH PM6249" IND_PM6249 11695,16650 r90 top
L8 "Inductor 10uH" "Inductor Surface Mount" 9395,6170 r90 top
P1 "OSTYC022150" "2 pin Terminal" 9840,5980 r180 top
P2 "CONN BARRIER" "Terminal Barrier 3PIN" 20690,17364.69 r90 top
P3 "CONN BARRIER" "Terminal Barrier 3PIN" 8310,18020.2 r270 top
PS1 "ITX2405S" "8 SIP" 8805,6415 r90 top
R1 "Resistor Precision" "Res Precision CSM3637Z" 17110.91,11727.09 r270 top value=0.02R
R2 "Resistor Precision" "Res Precision CSM3637Z" 8930.91,11675 r270 top value=0.02R
R3 "Resistor Power" "Axial 50mm" 14280,10706.5 r90 top value=5R
R4 "Resistor Precision" "Res Precision CSM3637Z" 17125,14645 r270 top value=0.02R
R5 "Resistor Precision" "Res Precision CSM3637Z" 8935.91,14580 r270 top value=0.02R
R6 "Resistor Power" "Axial 50mm" 14250,13626.5 r90 top value=5R
R7 "Resistor Precision" "Res Precision CSM3637Z" 17125,17495 r270 top value=0.02R
R8 "Resistor Precision" "Res Precision CSM3637Z" 8935.91,17447.09 r270 top value=0.02R
R9 "Resistor Power" "Axial 50mm" 14255,16496.5 r90 top value=5R
R10 "NC" "0603 (1608 Metric)" 17775,8077.48 r270 top value=160k
R11 "Resistor 1206" 1206 17642,8501.14 r270 top value=12R
R12 "Resistor 0603" "0603 (1608 Metric)" 17630,7417.48 r270 top value=0R
R13 "Resistor 0603" "0603 (1608 Metric)" 17550,7417.48 r270 top value=0R
R14 "Resistor 1206" 1206 17514,8501.14 r270 top value=12R
R15 "Resistor 0603" "0603 (1608 Metric)" 18300.28,9402.48 r90 top value=3.9k
R16 "Resistor 0603" "0603 (1608 Metric)" 18542.76,8750 r0 top value=3.16k
R17 "Resistor 0603" "0603 (1608 Metric)" 18395.28,9402.52 r90 top value=3.9k
R18 "Resistor 0603" "0603 (1608 Metric)" 18390.28,8750 r0 top value=11.5k
R19 "NC" "0603 (1608 Metric)" 16280,8085 r270 top value=160k
R20 "Resistor 1206" 1206 16142,8501.14 r270 top value=12R
R21 "Resistor 0603" "0603 (1608 Metric)" 16130,7417.48 r270 top value=0R
R22 "Resistor 0603" "0603 (1608 Metric)" 16050,7417.48 r270 top value=0R
R23 "Resistor 1206" 1206 16014,8501.14 r270 top value=12R
R24 "Resistor 0603" "0603 (1608 Metric)" 16800.28,9402.48 r90 top value=3.9k
R25 "Resistor 0603" "0603 (1608 Metric)" 17042.76,8750 r0 top value=3.16k
R26 "Resistor 0603" "0603 (1608 Metric)" 16895.28,9402.52 r90 top value=3.9k
R27 "Resistor 0603" "0603 (1608 Metric)" 16890.28,8750 r0 top value=11.5k
R28 "NC" "0603 (1608 Metric)" 19275,8105 r270 top value=160k
R29 "Resistor 1206" 1206 19141.72,8526.14 r270 top value=12R
R30 "Resistor 0603" "0603 (1608 Metric)" 19129.72,7442.48 r270 top value=10R
R31 "Resistor 0603" "0603 (1608 Metric)" 19049.72,7442.48 r270 top value=10R
R32 "Resistor 1206" 1206 19013.72,8526.14 r270 top value=12R
R33 "Resistor 0603" "0603 (1608 Metric)" 19800,9427.48 r90 top value=3.9k
R34 "Resistor 0603" "0603 (1608 Metric)" 20042.48,8775 r0 top value=3.16k
R35 "Resistor 0603" "0603 (1608 Metric)" 19895,9427.52 r90 top value=3.9k
R36 "Resistor 0603" "0603 (1608 Metric)" 19890,8775 r0 top value=11.5k
R37 "Resistor 0603" "0603 (1608 Metric)" 13520,9402.2 r90 top value=3.9k
R38 "Resistor 0603" "0603 (1608 Metric)" 13762.48,8749.72 r0 top value=3.16k
R39 "Resistor 0603" "0603 (1608 Metric)" 13615,9402.24 r90 top value=3.9k
R40 "Resistor 0603" "0603 (1608 Metric)" 13610,8749.72 r0 top value=11.5k
R41 "NC" "0603 (1608 Metric)" 14625,8067.48 r270 top value=160k
R42 "Resistor 1206" 1206 14341.18,9640 r180 top value=332k
R43 "Resistor 1206" 1206 14341.18,9490 r0 top value=332k
R44 "Resistor 1206" 1206 14491.18,8526.18 r270 top value=12R
R45 "Resistor 0603" "0603 (1608 Metric)" 14471.18,7487.48 r270 top value=10R
R46 "Resistor 1206" 1206 14342.36,9040 r0 top value=1.13k
R47 "Resistor 1206" 1206 14341.18,8880 r0 top value=NC
R48 "Resistor 0603" "0603 (1608 Metric)" 14390,7485 r270 top value=10R
R49 "Resistor 1206" 1206 14341.18,9340 r180 top value=332k
R50 "Resistor 1206" 1206 14342.36,9185 r0 top value=332k
R51 "Resistor 0603" "0603 (1608 Metric)" 14351.18,8727.52 r90 top value=0R
R52 "Resistor 1206" 1206 14351.18,8521.18 r270 top value=12R
R53 "NC" "0603 (1608 Metric)" 15170,8075 r270 top value=160k
R54 "Resistor 1206" 1206 14879.96,9634.96 r180 top value=332k
R55 "Resistor 1206" 1206 14879.96,9484.96 r0 top value=332k
R56 "Resistor 1206" 1206 15029.96,8521.14 r270 top value=12R
R57 "Resistor 0603" "0603 (1608 Metric)" 15009.96,7482.44 r270 top value=10R
R58 "Resistor 1206" 1206 14881.14,9034.96 r0 top value=1.13k
R59 "Resistor 1206" 1206 14879.96,8874.96 r0 top value=NC
R60 "Resistor 0603" "0603 (1608 Metric)" 14928.78,7479.96 r270 top value=10R
R61 "Resistor 1206" 1206 14879.96,9334.96 r180 top value=332k
R62 "Resistor 1206" 1206 14881.14,9179.96 r0 top value=332k
R63 "Resistor 0603" "0603 (1608 Metric)" 14889.96,8722.48 r90 top value=0R
R64 "Resistor 1206" 1206 14889.96,8516.14 r270 top value=12R
R65 "NC" "0603 (1608 Metric)" 15715,8070 r270 top value=160k
R66 "Resistor 1206" 1206 15430,9632.48 r180 top value=332k
R67 "Resistor 1206" 1206 15430,9482.48 r0 top value=332k
R68 "Resistor 1206" 1206 15580,8518.66 r270 top value=12R
R69 "Resistor 0603" "0603 (1608 Metric)" 15560,7479.96 r270 top value=10R
R70 "Resistor 1206" 1206 15431.18,9032.48 r0 top value=1.13k
R71 "Resistor 1206" 1206 15430,8872.48 r0 top value=NC
R72 "Resistor 0603" "0603 (1608 Metric)" 15478.82,7477.48 r270 top value=10R
R73 "Resistor 1206" 1206 15430,9332.48 r180 top value=332k
R74 "Resistor 1206" 1206 15431.18,9177.48 r0 top value=332k
R75 "Resistor 0603" "0603 (1608 Metric)" 15440,8720 r90 top value=0R
R76 "Resistor 1206" 1206 15440,8513.66 r270 top value=12R
R77 "NC" "0603 (1608 Metric)" 8825,8082.52 r270 top value=160k
R78 "Resistor 1206" 1206 8686.72,8501.14 r270 top value=12R
R79 "Resistor 0603" "0603 (1608 Metric)" 8670,7417.48 r270 top value=10R
R80 "Resistor 0603" "0603 (1608 Metric)" 8594.72,7417.48 r270 top value=10R
R81 "Resistor 1206" 1206 8558.72,8501.14 r270 top value=12R
R82 "Resistor 0603" "0603 (1608 Metric)" 9345,9402.48 r90 top value=3.9k
R83 "Resistor 0603" "0603 (1608 Metric)" 9587.48,8750 r0 top value=3.16k
R84 "Resistor 0603" "0603 (1608 Metric)" 9440,9402.52 r90 top value=3.9k
R85 "Resistor 0603" "0603 (1608 Metric)" 9435,8750 r0 top value=11.5k
R86 "NC" "0603 (1608 Metric)" 10319.72,8082.44 r270 top value=160k
R87 "Resistor 1206" 1206 10191.72,8501.14 r270 top value=12R
R88 "Resistor 0603" "0603 (1608 Metric)" 10179.72,7417.48 r270 top value=10R
R89 "Resistor 0603" "0603 (1608 Metric)" 10099.72,7417.48 r270 top value=10R
R90 "Resistor 1206" 1206 10063.72,8501.14 r270 top value=12R
R91 "Resistor 0603" "0603 (1608 Metric)" 10850,9402.48 r90 top value=3.9k
R92 "Resistor 0603" "0603 (1608 Metric)" 11092.48,8750 r0 top value=3.16k
R93 "Resistor 0603" "0603 (1608 Metric)" 10945,9402.52 r90 top value=3.9k
R94 "Resistor 0603" "0603 (1608 Metric)" 10940,8750 r0 top value=11.5k
R95 "NC" "0603 (1608 Metric)" 11790,8082.52 r270 top value=160k
R96 "Resistor 1206" 1206 11657,8501.14 r270 top value=12R
R97 "Resistor 0603" "0603 (1608 Metric)" 11645,7417.48 r270 top value=10R
R98 "Resistor 0603" "0603 (1608 Metric)" 11565,7417.48 r270 top value=10R
R99 "Resistor 1206" 1206 11529,8501.14 r270 top value=12R
R100 "Resistor 0603" "0603 (1608 Metric)" 12315.28,9402.48 r90 top value=3.9k
R101 "Resistor 0603" "0603 (1608 Metric)" 12557.76,8750 r0 top value=3.16k
R102 "Resistor 0603" "0603 (1608 Metric)" 12410.28,9402.52 r90 top value=3.9k
R103 "Resistor 0603" "0603 (1608 Metric)" 12405.28,8750 r0 top value=11.5k
R104 "Resistor 0603" "0603 (1608 Metric)" 14930,6725 r0 top value=499R
R105 "Resistor 0603" "0603 (1608 Metric)" 17525,6725 r0 top value=499R
R106 "Resistor 0603" "0603 (1608 Metric)" 14337.48,6800 r0 top value=NC
R107 "Resistor 0603" "0603 (1608 Metric)" 16932.48,6800 r0 top value=NC
R108 "Resistor 0603" "0603 (1608 Metric)" 14740,7007.48 r90 top value=499R
R109 "Resistor 0603" "0603 (1608 Metric)" 17335,7007.48 r90 top value=499R
R110 "Resistor 0603" "0603 (1608 Metric)" 14772.52,7120 r0 top value=NC
R111 "Resistor 0603" "0603 (1608 Metric)" 17367.52,7120 r0 top value=NC
R112 "Resistor 0603" "0603 (1608 Metric)" 14707.52,6540 r180 top value=NC
R113 "Resistor 0603" "0603 (1608 Metric)" 17302.52,6540 r180 top value=NC
R114 "Resistor 0603" "0603 (1608 Metric)" 14660,7007.48 r90 top value=499R
R115 "Resistor 0603" "0603 (1608 Metric)" 17255,7007.48 r90 top value=499R
R116 "Resistor 0603" "0603 (1608 Metric)" 14627.52,7120 r180 top value=NC
R117 "Resistor 0603" "0603 (1608 Metric)" 14485,6730 r180 top value=499R
R118 "Resistor 0603" "0603 (1608 Metric)" 17222.52,7120 r180 top value=NC
R119 "Resistor 0603" "0603 (1608 Metric)" 17080,6730 r180 top value=499R
R120 "Resistor 0603" "0603 (1608 Metric)" 15765,6735 r0 top value=499R
R121 "Resistor 0603" "0603 (1608 Metric)" 18360,6735 r0 top value=499R
R122 "Resistor 0603" "0603 (1608 Metric)" 15170,6800 r0 top value=NC
R123 "Resistor 0603" "0603 (1608 Metric)" 17765,6800 r0 top value=NC
R124 "Resistor 0603" "0603 (1608 Metric)" 15575,7002.48 r90 top value=499R
R125 "Resistor 0603" "0603 (1608 Metric)" 18170,7002.48 r90 top value=499R
R126 "Resistor 0603" "0603 (1608 Metric)" 15610,7120 r0 top value=NC
R127 "Resistor 0603" "0603 (1608 Metric)" 18205,7120 r0 top value=NC
R128 "Resistor 0603" "0603 (1608 Metric)" 15545,6545 r180 top value=NC
R129 "Resistor 0603" "0603 (1608 Metric)" 18140,6545 r180 top value=NC
R130 "Resistor 0603" "0603 (1608 Metric)" 15500,7005 r90 top value=499R
R131 "Resistor 0603" "0603 (1608 Metric)" 18095,7005 r90 top value=499R
R132 "Resistor 0603" "0603 (1608 Metric)" 15467.52,7120 r180 top value=NC
R133 "Resistor 0603" "0603 (1608 Metric)" 15320,6730 r180 top value=499R
R134 "Resistor 0603" "0603 (1608 Metric)" 18062.52,7120 r180 top value=NC
R135 "Resistor 0603" "0603 (1608 Metric)" 17915,6730 r180 top value=499R
R136 "Resistor 0603" "0603 (1608 Metric)" 16607.48,6740 r0 top value=499R
R137 "Resistor 0603" "0603 (1608 Metric)" 19202.48,6740 r0 top value=499R
R138 "Resistor 0603" "0603 (1608 Metric)" 16015,6825 r0 top value=NC
R139 "Resistor 0603" "0603 (1608 Metric)" 18617.48,6825 r0 top value=NC
R140 "Resistor 0603" "0603 (1608 Metric)" 16430,7012.48 r90 top value=499R
R141 "Resistor 0603" "0603 (1608 Metric)" 19025,7012.48 r90 top value=499R
R142 "Resistor 0603" "0603 (1608 Metric)" 16465,7130 r0 top value=NC
R143 "Resistor 0603" "0603 (1608 Metric)" 19060,7130 r0 top value=NC
R144 "Resistor 0603" "0603 (1608 Metric)" 16382.48,6545 r180 top value=NC
R145 "Resistor 0603" "0603 (1608 Metric)" 18977.48,6545 r180 top value=NC
R146 "Resistor 0603" "0603 (1608 Metric)" 16340,7012.48 r90 top value=499R
R147 "Resistor 0603" "0603 (1608 Metric)" 18935,7012.48 r90 top value=499R
R148 "Resistor 0603" "0603 (1608 Metric)" 16312.52,7130 r180 top value=NC
R149 "Resistor 0603" "0603 (1608 Metric)" 16157.52,6735 r180 top value=499R
R150 "Resistor 0603" "0603 (1608 Metric)" 18907.52,7130 r180 top value=NC
R151 "Resistor 0603" "0603 (1608 Metric)" 18752.52,6735 r180 top value=499R
R152 "Resistor 0603" "0603 (1608 Metric)" 10360.04,6730 r0 top value=499R
R153 "Resistor 0603" "0603 (1608 Metric)" 9762.52,6805 r0 top value=NC
R154 "Resistor 0603" "0603 (1608 Metric)" 10170.04,7012.48 r90 top value=499R
R155 "Resistor 0603" "0603 (1608 Metric)" 10202.56,7125 r0 top value=NC
R156 "Resistor 0603" "0603 (1608 Metric)" 10137.56,6545 r180 top value=NC
R157 "Resistor 0603" "0603 (1608 Metric)" 10090.04,7012.48 r90 top value=499R
R158 "Resistor 0603" "0603 (1608 Metric)" 10057.56,7125 r180 top value=NC
R159 "Resistor 0603" "0603 (1608 Metric)" 9915.04,6735 r180 top value=499R
R160 "Resistor 0603" "0603 (1608 Metric)" 11195.04,6740 r0 top value=499R
R161 "Resistor 0603" "0603 (1608 Metric)" 10600.04,6805 r0 top value=NC
R162 "Resistor 0603" "0603 (1608 Metric)" 11005.04,7007.48 r90 top value=499R
R163 "Resistor 0603" "0603 (1608 Metric)" 11040.04,7125 r0 top value=NC
R164 "Resistor 0603" "0603 (1608 Metric)" 10975.04,6550 r180 top value=NC
R165 "Resistor 0603" "0603 (1608 Metric)" 10930.04,7010 r90 top value=499R
R166 "Resistor 0603" "0603 (1608 Metric)" 10897.56,7125 r180 top value=NC
R167 "Resistor 0603" "0603 (1608 Metric)" 10750.04,6735 r180 top value=499R
R168 "Resistor 0603" "0603 (1608 Metric)" 12037.52,6745 r0 top value=499R
R169 "Resistor 0603" "0603 (1608 Metric)" 11445.04,6830 r0 top value=NC
R170 "Resistor 0603" "0603 (1608 Metric)" 11860.04,7017.48 r90 top value=499R
R171 "Resistor 0603" "0603 (1608 Metric)" 11895.04,7135 r0 top value=NC
R172 "Resistor 0603" "0603 (1608 Metric)" 11812.52,6550 r180 top value=NC
R173 "Resistor 0603" "0603 (1608 Metric)" 11770.04,7017.48 r90 top value=499R
R174 "Resistor 0603" "0603 (1608 Metric)" 11742.56,7135 r180 top value=NC
R175 "Resistor 0603" "0603 (1608 Metric)" 11587.56,6740 r180 top value=499R
T1 "750313769" "Xmr SN6501" 17925.2,7645 r90 top
T2 "750313769" "Xmr SN6501" 16425.2,7645 r90 top
T3 "750313769" "Xmr SN6501" 19424.92,7670 r90 top
T4 "750313769" "Xmr SN6501" 13144.92,7644.72 r90 top
T5 "750313769" "Xmr SN6501" 8969.92,7645 r90 top
T6 "750313769" "Xmr SN6501" 10474.92,7645 r90 top
T7 "750313769" "Xmr SN6501" 11940.2,7645 r90 top
U1 "AMC1100" SOIC8 17662,8051.09 r180 top
U2 "TLV70450DBV" SOT23-5 17855.28,8770 r90 top
U3 "SN6501" SOT23-5 18097.87,7443.15 r180 top
U4 "TPS7A30" 8-TSSOP 18481.89,8442.68 r180 top
U5 "AMC1100" SOIC8 16162,8051.09 r180 top
U6 "TLV70450DBV" SOT23-5 16355.28,8770 r90 top
U7 "SN6501" SOT23-5 16597.87,7443.15 r180 top
U8 "TPS7A30" 8-TSSOP 16981.89,8442.68 r180 top
U9 "AMC1100" SOIC8 19161.72,8076.09 r180 top
U10 "TLV70450DBV" SOT23-5 19355,8795 r90 top
U11 "SN6501" SOT23-5 19597.6,7468.15 r180 top
U12 "TPS7A30" 8-TSSOP 19981.61,8467.68 r180 top
U13 "TLV70450DBV" SOT23-5 13075,8769.72 r90 top
U14 "SN6501" SOT23-5 13317.6,7442.87 r180 top
U15 "TPS7A30" 8-TSSOP 13701.61,8442.4 r180 top
U16 "AMC1100" SOIC8 14506.18,8050 r180 top
U17 "AMC1100" SOIC8 15044.96,8044.96 r180 top
U18 "AMC1100" SOIC8 15595,8049.13 r180 top
U19 "AMC1100" SOIC8 8706.72,8051.09 r180 top
U20 "TLV70450DBV" SOT23-5 8900,8770 r90 top
U21 "SN6501" SOT23-5 9142.6,7443.15 r180 top
U22 "TPS7A30" 8-TSSOP 9526.61,8442.68 r180 top
U23 "AMC1100" SOIC8 10211.72,8051.09 r180 top
U24 "TLV70450DBV" SOT23-5 10405,8770 r90 top
U25 "SN6501" SOT23-5 10647.6,7443.15 r180 top
U26 "TPS7A30" 8-TSSOP 11031.61,8442.68 r180 top
U27 "AMC1100" SOIC8 11677,8051.09 r180 top
U28 "TLV70450DBV" SOT23-5 11870.28,8770 r90 top
U29 "SN6501" SOT23-5 12112.87,7443.15 r180 top
U30 "TPS7A30" 8-TSSOP 12496.89,8442.68 r180 top
U31 "ISL21010" SOT_23 14720,6170 r90 top
U32 "ISL21010" SOT_23 17315,6190 r90 top
U33 "AD8132" SO8_L 14705,6820 r0 top
U34 "AD8132" SO8_L 17300,6820 r0 top
U35 "AD8132" SO8_L 15540,6820 r0 top
U36 "AD8132" SO8_L 18135,6820 r0 top
U37 "AD8132" SO8_L 16390,6820 r0 top
U38 "AD8132" SO8_L 18985,6820 r0 top
U39 "ISL21010" SOT_23 12435,6333.31 r180 top
U40 "AD8132" SO8_L 10135.04,6825 r0 top
U41 "AD8132" SO8_L 10970.04,6825 r0 top
U42 "AD8132" SO8_L 11820.04,6825 r0 top

## Footprints (in the part's own frame and the unit in brackets; to place one, negate y for a bottom-side part, rotate by r counter-clockwise, add the part's x,y. Pads: shape width x height; smd on the part's side, far side on the other; paste and mask are expansions set on the pad)
"2 pin Terminal" [mm] "OSTYC022150 terminal"
  round 2.2 hole 1.3: 1(-2.54,0) 2(2.54,0)
  silkscreen extent -6,-5 6,5
"8 SIP" [mm] "ITX2403SA 3.3V supply"
  round 1.5 hole 0.8: 1(-8.89,0) 2(-6.35,0) 3(-3.81,0) 4(-1.27,0) 5(1.27,0) 6(3.81,0) 7(6.35,0) 8(8.89,0)
  silkscreen extent -12,-7.62 12,4.57, body extent -10.92,-6.86 10.92,3.81, height 11.18
8-TSSOP [mm]
  rect 0.4x1.6 smd mask+0: 1(-0.975,-2.1) 2(-0.325,-2.1) 3(0.325,-2.1) 4(0.975,-2.1) 5(0.975,2.1) 6(0.325,2.1) 7(-0.325,2.1) 8(-0.975,2.1)
  rect 1.89x1.57 smd mask+0: 9(0,0)
  round 0.4 on Top Overlay: ""(-1.8,-2.8)
"0603 (1608 Metric)" [mm]
  rect 1.1x1.1 smd: 1(-0.825,0) 2(0.825,0)
  silkscreen extent -1.65,-0.84 1.65,0.84, body extent -1.02,-0.51 1.02,0.51, height 0.5
"0805 (2012 metric)" [mm]
  rect 1.1x1.3 smd: 1(-1.15,0) 2(1.15,0)
  silkscreen extent -2.05,-1 2.05,1
"0805 (2012 Metric) Diode" [mm]
  rect 1.1x1.3 smd: A(-1.15,0) K(1.15,0)
  silkscreen extent -2.05,-1 2.05,2.3
1206 [mm] "1206\" surface mount"
  rect 1.2x1.9 smd: 1(-1.3,0) 2(1.3,0)
  silkscreen extent -2.25,-1.3 2.25,1.3, body extent -1.6,-0.72 1.6,0.73, height 1
"1812 (4532 Metric)" [mm]
  rect 3.5x1.5 smd: 1(0,-2.05) 2(0,2.05)
  silkscreen extent -2.25,-3.25 2.25,3.25, body extent -1.63,-2.25 1.57,2.25, height 1.5
"Axial 50mm" [mm]
  round 2.2 hole 1.4: 1(0,0) 2(50,0)
  silkscreen extent 2.5,-5 47.7,5
"CM Choke" [mm] "Vertical, 6 PC Pin"
  round 3.4 hole 2.6: 1(0,0) 2(20,0) 3(40,0) 4(40,31) 5(20,31) 6(0,31)
  silkscreen extent -8.1,-5.5 47.9,35.8
"Connector D-Sub Receptacle 25 pos" [mil] "Connector D-sub Receptacle 25 pos, Digi-Key: A35111-ND"
  round 70 hole 45: 1(-654.33,-55.91) 2(-545.28,-55.91) 3(-436.22,-55.91) 4(-327.17,-55.91) 5(-218.11,-55.91) 6(-109.06,-55.91) 7(0,-55.91) 8(109.06,-55.91) 9(218.11,-55.91) 10(327.17,-55.91) 11(436.22,-55.91) 12(545.28,-55.91) 13(654.33,-55.91) 14(599.8,55.91) 15(490.75,55.91) 16(381.69,55.91) 17(272.64,55.91) 18(163.58,55.91) 19(54.53,55.91) 20(-54.53,55.91) 21(-163.58,55.91) 22(-272.64,55.91) 23(-381.69,55.91) 24(-490.75,55.91) 25(-599.8,55.91)
  round 150 hole 125.2: 26(-925.98,0) 27(925.98,0)
  silkscreen extent -1080,-200 1060,201
IND_PM6249 [mm]
  round 2.6 hole 2: 1(0,0) 2(5.08,0) 3(10.16,0) 4(15.24,0) 5(20.32,0) 6(25.4,0) 7(30.48,0) 8(35.56,0) 9(35.56,55.88) 10(30.48,55.88) 11(25.4,55.88) 12(20.32,55.88) 13(15.24,55.88) 14(10.16,55.88) 15(5.08,55.88) 16(0,55.88)
  round 1 hole 4 unplated: ""(-12.7,27.94) ""(48.26,27.94)
  silkscreen extent -16.2,-2.7 51.4,58.3
"Inductor Surface Mount" [mm] "744043100"
  rect 5.5x1 smd: 1(0,0) 2(0,5)
  silkscreen extent -3.18,-0.89 3.17,5.84, body extent -2.37,0.14 2.43,4.94, height 2
POWERDI [mm]
  rect 2.4x1.5 smd mask+0.07: 1(2.375,0)
  rect 1.05x1.5 smd mask+0.07: 2(0,0)
  silkscreen extent -1.1,-1.5 4.5,1.5
RAD-0.3 [mm] "Radial Cap, Thru-Hole; 2 Leads; 0.3 in Pin Spacing"
  round 1.2 hole 0.7: 1(-3.81,0) 2(3.81,0)
  silkscreen extent -5.71,-1.91 5.71,1.91
"Radial - 4 Leads" [mm]
  round 2.2 hole 1.6: 1(0,0) 2(0,-10.2) 3(52.5,-10.2) 4(52.5,0)
  silkscreen extent -3.1,-13.4 55.3,3